# Altium PCB DC3.PcbDoc
Units mil, origin at the board's own origin, x right, y up, seen from the top; angles counter-clockwise.
Board outline 6000 x 4000 mil, 2 copper layers (Top Layer, Bottom Layer); 5 components, 2 nets, 26 pads, 0 vias.
Unrouted connection lines stored in the file: 10.
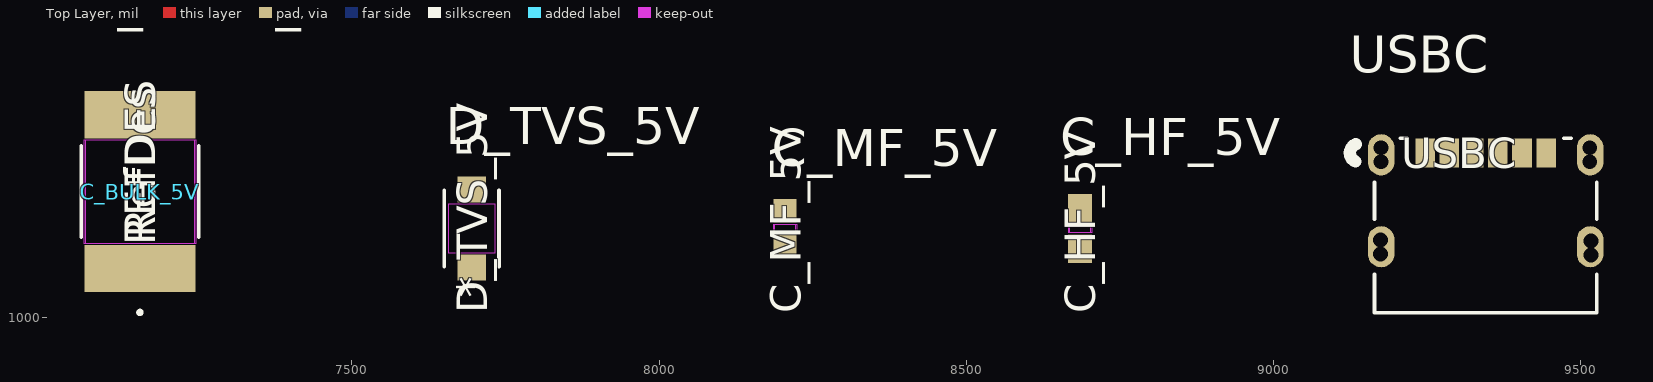
[diagram p0: Top Layer view]
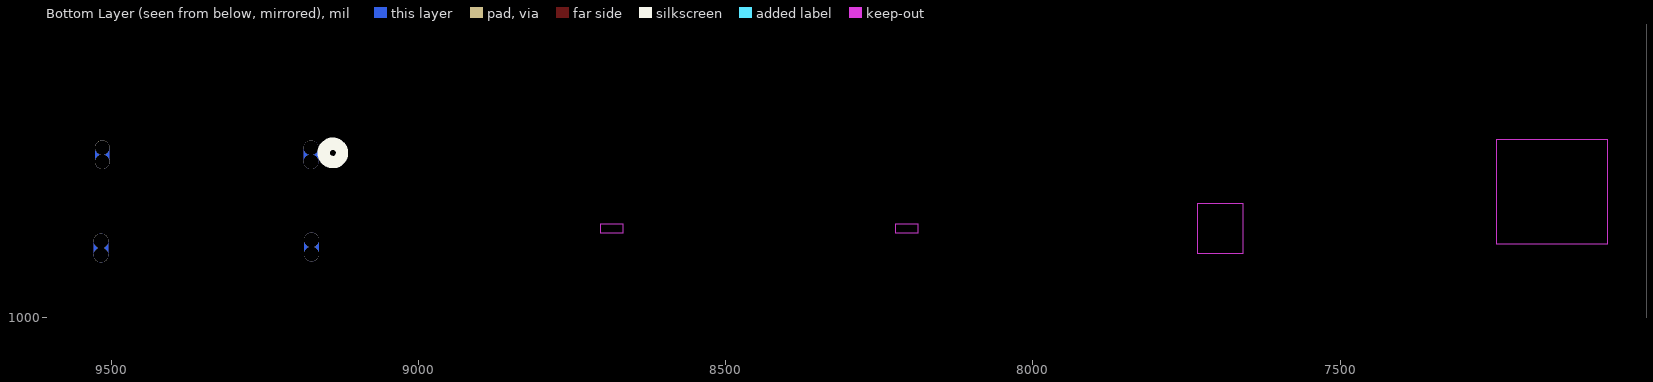
[diagram p1: Bottom Layer view, seen from below]

## Layer stack, top to bottom
Top Solder: solder mask 0.4, Solder Resist, Dk 3.5
Top Layer: signal copper 1.4
Dielectric 1: dielectric 12.6, FR-4, Dk 4.8
Bottom Layer: signal copper 1.4
Bottom Solder: solder mask 0.4, Solder Resist, Dk 3.5

## Board outline
1000,1000 7000,1000 7000,5000 1000,5000

## Design rules (kind name [scope] priority, off if disabled: settings)
Clearance [All] p1: gap=10 ignorepadtopadclearanceinfootprint=FALSE
PolygonConnect [All] p1: connectstyle=Relief reliefconductorwidth=10 reliefentries=4 polygonreliefangle="90 Angle" airgapwidth=10
RoutingVias [All] p1: holewidth=28 width=50 viastyle="Through Hole" minholewidth=28 minwidth=50 maxholewidth=28 maxwidth=50
SolderMaskExpansion [All] p1: expansion=4 istentingtop=FALSE
SupplyNets "Schematic Supply Nets_1" [InNet('GND')] p1: voltage=0.000
SupplyNets "Schematic Supply Nets" [InNet('5V_OUT')] p2: voltage=0.000
Width [All] p1: maxlimit=10 minlimit=10 preferedwidth=10
30 further rules are at their usual default settings.

## Components (designator, comment, footprint, x,y, rotation, side; value= is the part's Value field where it differs from the comment)
C_BULK_5V "T59EE476M050C0100" CAP_T59EE_VIS 7155,1205 r90 top
C_HF_5V "VJ0603Y105KXJCW1BC" CAPC17595_95N_KEM-M 8685,1145 r90 top
C_MF_5V "C0603C104K5RACTU" CAPC17595_95N_KEM 8205,1145 r90 top
D_TVS_5V "SMF5.0A" SMFSeries_LTF 7695,1145 r90 top
USBC "USB4125-GF-A" CONN6_USB4125_GCT 9345,1150 r0 top

## Footprints (in the part's own frame and the unit in brackets; to place one, negate y for a bottom-side part, rotate by r counter-clockwise, add the part's x,y. Pads: shape width x height; smd on the part's side, far side on the other; paste and mask are expansions set on the pad)
CAP_T59EE_VIS [mil]
  rect 77x181 smd paste+0 mask+0: 1(-125,0) 2(125,0)
  Top Layer keep-out region: -84.5,-88.5 -84.5,88.5 84.5,88.5 84.5,-88.5
  Keep-Out Layer region: -84.5,-90.5 -84.5,90.5 84.5,90.5 84.5,-90.5
  silkscreen extent -199,-96 74,96, body extent -149,-91 149,91, height 169
CAPC17595_95N_KEM [mm]
  rect 1x0.95 smd paste+0 mask+0: 1(-0.725,0) 2(0.725,0)
  Top Layer keep-out region: -0.174,-0.424 -0.174,0.424 0.174,0.424 0.174,-0.424
  Keep-Out Layer region: -0.174,-0.475 -0.174,0.475 0.174,0.475 0.174,-0.475
  body extent -0.87,-0.48 0.87,0.48, height 0.95
CAPC17595_95N_KEM-M [mm]
  rect 1.2x1 smd paste+0 mask+0: 1(-0.825,0) 2(0.825,0)
  Top Layer keep-out region: -0.174,-0.424 -0.174,0.424 0.174,0.424 0.174,-0.424
  Keep-Out Layer region: -0.174,-0.475 -0.174,0.475 0.174,0.475 0.174,-0.475
  body extent -0.87,-0.48 0.87,0.48, height 0.95
CONN6_USB4125_GCT [mil]
  oval 43x67 smd paste-33.5 mask-33.5: 7(-170.08,114.95) 8(170.08,114.95) 9(-170.08,-34.65) 10(170.08,-34.65)
  rect 32x47 smd paste+0 mask+0: A5(-19.68,118.1) A9(59.06,118.1) A12(98.42,118.1) B5(19.68,118.1) B9(-59.06,118.1) B12(-98.42,118.1)
  round 24 hole 24 unplated paste-99999 mask+0: S_1_H1(-170.19,126.61) S_1_H2(-170.19,103.61) S_2_H1(169.36,126.61) S_2_H2(169.36,103.61) S_3_H1(-171.22,-23.62) S_3_H2(-171.22,-46.62) S_4_H1(171.41,-25.16) S_4_H2(171.41,-48.16)
  Multi-Layer lines w24: -171.22,-46.62 -171.22,-23.62 ; -170.19,103.61 -170.19,126.61 ; 169.36,103.61 169.36,126.61 ; 171.41,-48.16 171.41,-25.16
  silkscreen extent -221,-142 181,142
SMFSeries_LTF [mil]
  rect 42.87x47 smd paste+0 mask+0: 1(-63.44,0) 2(63.44,0)
  Top Layer keep-out region: -40,-37.5 -40,37.5 40,37.5 40,-37.5
  Keep-Out Layer region: -40,-37.5 -40,37.5 40,37.5 40,-37.5
  silkscreen extent -62,-45 62,45, body extent -77,-39 77,39, height 43

## Part data
C_BULK_5V: ki_fp_filters="CAP_T59EE_VIS CAP_T59EE_VIS-M CAP_T59EE_VIS-L", ki_keywords=T59EE476M050C0100, Supplier=https://www.vishay.com/doc?40191
C_HF_5V: ki_fp_filters="CAP_VJ0603_VIS CAP_VJ0603_VIS-M CAP_VJ0603_VIS-L", ki_keywords=VJ0603Y105KXJCW1BC, Supplier=https://www.vishay.com/doc?28548
C_MF_5V: ki_fp_filters="CAPC17595_95N_KEM CAPC17595_95N_KEM-M CAPC17595_95N_KEM-L", ki_keywords=C0603C104K5RACTU, Supplier=https://content.kemet.com/datasheets/KEM_C1002_X7R_SMD.pdf
D_TVS_5V: ki_fp_filters="SMFSeries_LTF SMFSeries_LTF-M SMFSeries_LTF-L", ki_keywords=SMF5.0A, Supplier=SMF5.0A
USBC: ki_fp_filters=CONN6_USB4125_GCT, ki_keywords=USB4125-GF-A, Supplier=USB4125-GF-A

## Nets (pads, with @x,y where several pads share a name; then routed paths per layer and width w, separated by ;. In a path a pad name is that pad's centre, name@x,y a point inside that pad or via, vN(x,y) a via of type N, cw(c..) or ccw(c..) an arc to the next point about the centre after c; other vN are vias at no path point)
5V_OUT: C_BULK_5V.1 C_HF_5V.1 C_MF_5V.1 D_TVS_5V.2 USBC.A9 USBC.B9
GND: C_BULK_5V.2 C_HF_5V.2 C_MF_5V.2 D_TVS_5V.1 USBC.A12 USBC.B12
pads on no net: USBC.7 USBC.8 USBC.9 USBC.10 USBC.A5 USBC.B5 USBC.S_1_H1 USBC.S_1_H2 USBC.S_2_H1 USBC.S_2_H2 USBC.S_3_H1 USBC.S_3_H2 USBC.S_4_H1 USBC.S_4_H2

## Text inside footprints (layer, text, board x,y; h text height)
C_BULK_5V: Top Overlay "REFDES" at 7180,1117.5 h50 r90; Top Overlay "RefDes" at 7180,1130 h50 r90; Mechanical 13 "RefDes2" at 7180,1117.5 h50 r90
D_TVS_5V: Top Overlay "*" at 7720,1032.63 h50 r90; Mechanical 13 "*" at 7720,1085.5 h50 r90